# Altium PCB USB_to_CAN.PcbDoc
Units mil, origin at the board's own origin, x right, y up, seen from the top; angles counter-clockwise.
Board outline 2510 x 1345 mil, 2 copper layers (Top Layer, Bottom Layer); 43 components, 32 nets, 190 pads, 41 vias.
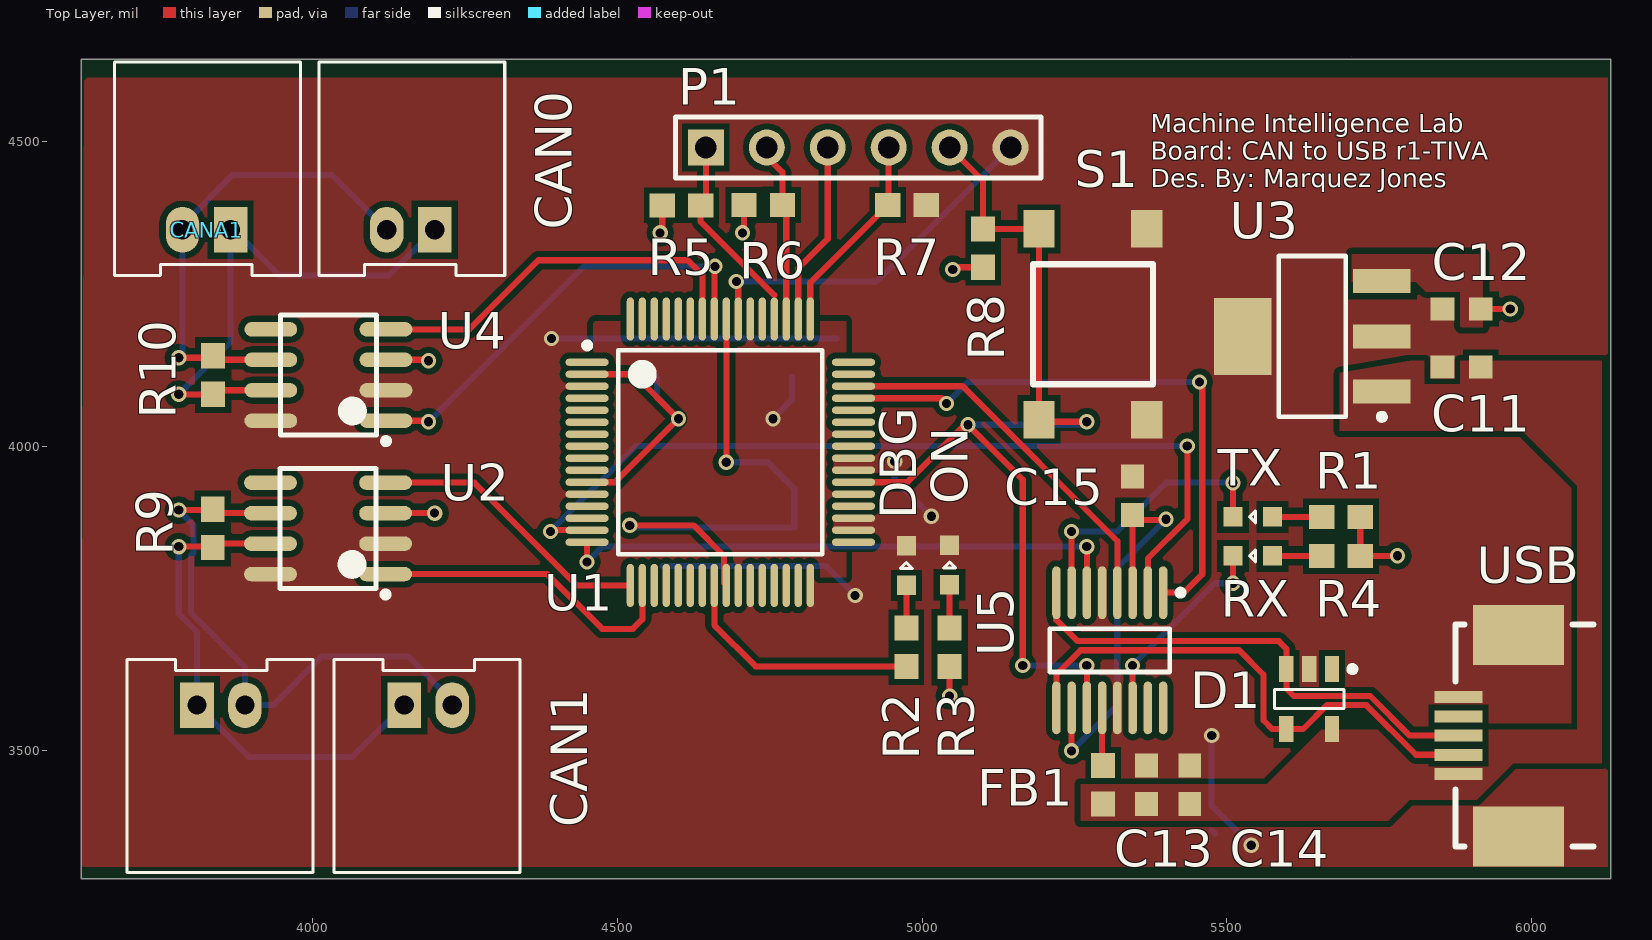
[diagram p0: Top Layer view]
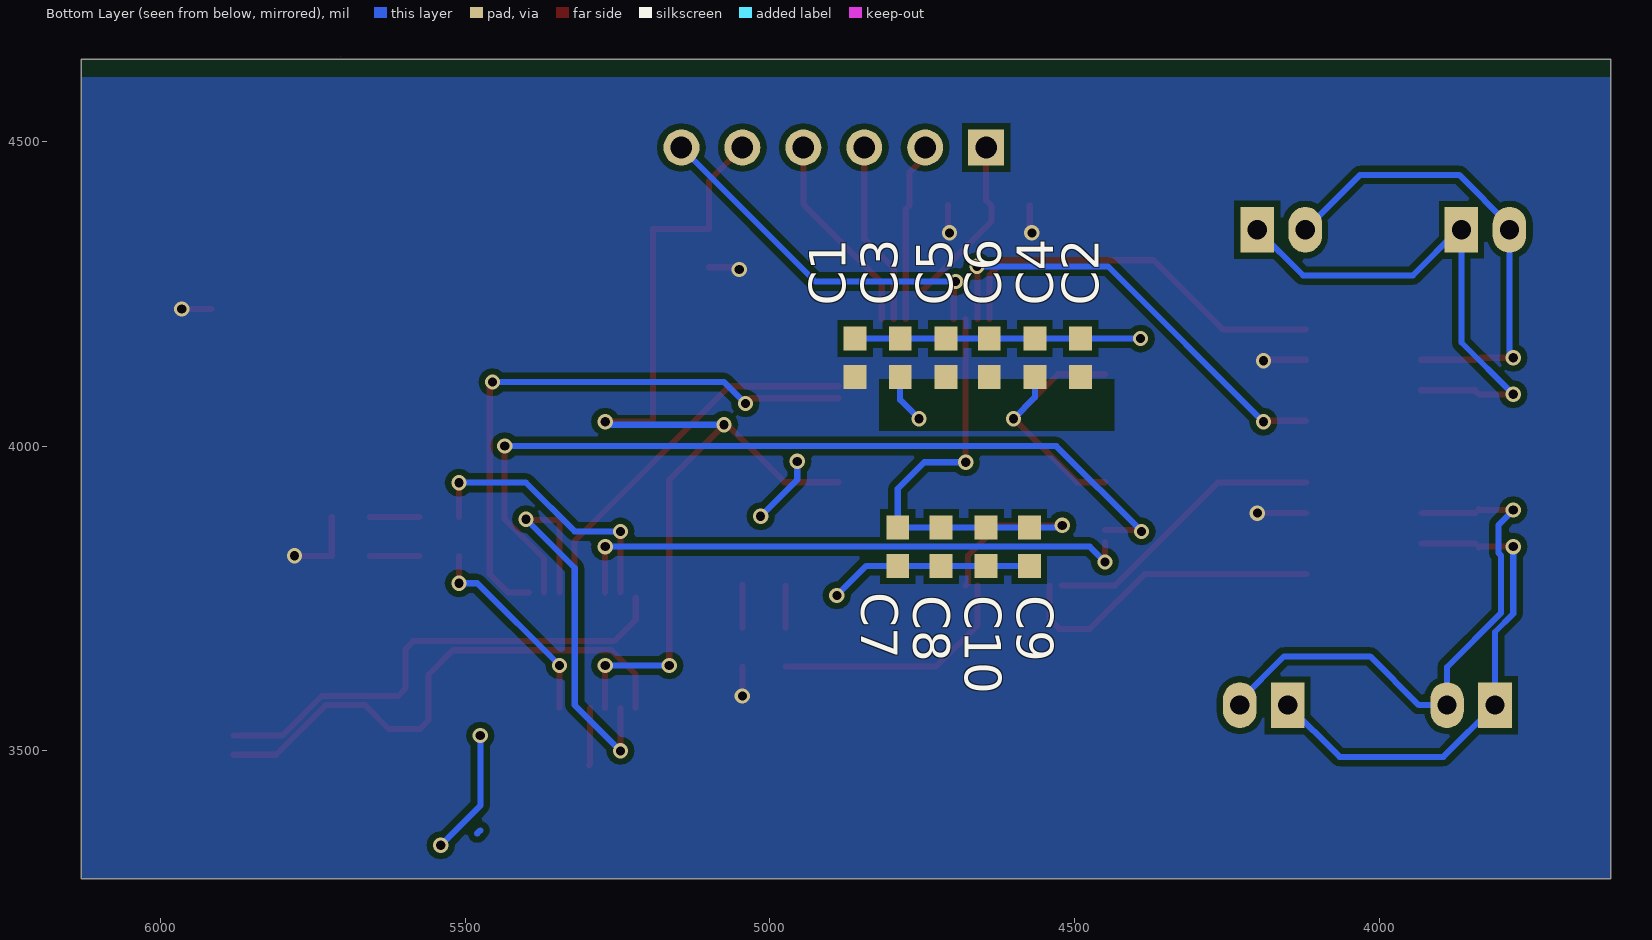
[diagram p1: Bottom Layer view, seen from below]

## Layer stack, top to bottom
Top Solder: solder mask 0.4, Solder Resist, Dk 3.5
Top Layer: signal copper 1.4
Dielectric 1: dielectric 12.6, FR-4, Dk 4.8
Bottom Layer: signal copper 1.4
Bottom Solder: solder mask 0.4, Solder Resist, Dk 3.5

## Board outline
3620,3290 3620,4635 6130,4635 6130,3290
cut-out: 5705,4640

## Design rules (kind name [scope] priority, off if disabled: settings)
Clearance [All] p1: gap=10 ignorepadtopadclearanceinfootprint=FALSE except(0: Arc-Hole Track-Hole SMDPad-Hole THPad-Hole Via-Hole Fill-Hole Poly-Hole Region-Hole Text-Hole; 5: Track-Track Track-SMDPad SMDPad-SMDPad; 7: Track-Via)
MinimumSolderMaskSliver [All] p1: minsoldermaskwidth=5
PolygonConnect [All] p1: connectstyle=Direct reliefconductorwidth=10 reliefentries=4 polygonreliefangle="90 Angle" airgapwidth=10
RoutingVias [All] p1: holewidth=28 width=50 viastyle="Through Hole" minholewidth=28 minwidth=50 maxholewidth=28 maxwidth=50
SolderMaskExpansion [All] p1: expansion=4
Width [All] p1: maxlimit=10 minlimit=10 preferedwidth=10
29 further rules are at their usual default settings.

## Components (designator, comment, footprint, x,y, rotation, side; value= is the part's Value field where it differs from the comment)
C1 "Cap" CAPC0603 4860,4145 r90 bottom value=0.01uF
C2 "Cap" CAPC0603 4490,4145 r90 bottom value=0.1uF
C3 "Cap" CAPC0603 4786.03,4145 r90 bottom value=0.01uF
C4 "Cap" CAPC0603 4565,4145 r90 bottom value=0.1uF
C5 "Cap" CAPC0603 4711.03,4145 r90 bottom value=0.01uF
C6 "Cap" CAPC0603 4640,4145 r90 bottom value=1.0uF
C7 "Cap" CAPC0603 4790,3835 r270 bottom value=0.1uF
C8 "Cap" CAPC0603 4718.97,3835 r270 bottom value=0.1uF
C9 "Cap" CAPC0603 4573.97,3835 r270 bottom value=1.0uF
C10 "Cap" CAPC0603 4645,3835 r270 bottom value=2.2uF
C11 "Cap" CAPC0603 5885,4130 r180 top value=1uF
C12 "Cap" CAPC0603 5885,4225 r180 top value=1uF
C13 "Cap" CAPC0603 5367.93,3444.36 r90 top value=4.7uF
C14 "Cap" CAPC0603 5438.97,3444.36 r90 top value=100nF
C15 "Cap" CAPC0603 5345,3918.26 r90 top value=100nF
CAN0 "2-pin Horz Sherlock" MOLEX-HDR-1X2-SHERLOCK-HORZ 4200,4355 r0 top (schematic designator CANA0)
CAN1 "2-pin Horz Sherlock" MOLEX-HDR-1X2-SHERLOCK-HORZ 4150,3575 r180 top (schematic designator CANB1)
CANA1 "2-pin Horz Sherlock" MOLEX-HDR-1X2-SHERLOCK-HORZ 3865,4355 r0 top
CANB0 "2-pin Horz Sherlock" MOLEX-HDR-1X2-SHERLOCK-HORZ 3810,3575 r180 top
D1 "824011" SOT95P280X116-5N 5635,3585 r270 top
DBG "LED" LED0603 4973.97,3804.03 r90 top (schematic designator LED37)
FB1 "FBead" RES0603 5296.9,3444.36 r90 top
ON "LED" LED0603 5045,3805 r90 top
P1 "JTAG" HDR1X6 4645,4490 r0 top
R1 "Res" RES0603 5687.24,3883.97 r180 top value=1k
R2 "Res" RES0603 4973.97,3670 r90 top value=10k
R3 "Res" RES0603 5045,3670 r90 top value=10k
R4 "Res" RES0603 5687.24,3820 r180 top value=1k
R5 "Res" RES0603 4605,4395 r0 top value=10k
R6 "Res" RES0603 4739.03,4395.54 r0 top value=10k
R7 "Res" RES0603 4975,4395.54 r0 top value=10k
R8 "Res" RES0603 5100,4325 r90 top value=10k
R9 "Res" RES0603 3835.86,3865 r270 top value=120
R10 "Res" RES0603 3836.5,4116.67 r270 top value=120
RX "LED" LED0603 5542.24,3820 r180 top
S1 "Button" PTS645xxxxSMTR92 5280,4200 r90 top
TX "LED" LED0603 5542.24,3883.97 r180 top
U1 "TM4C123GH6PMT7R" PM0064A_N 4668.68,3990 r0 top value=Value
U2 "SN65HVD230DR" SOIC-8pin 4025,3865 r180 top
U3 "3.3V LDO Reg" SOT23-4n 5640,4180 r180 top
U4 "SN65HVD230DR" SOIC-8pin 4025.64,4116.67 r180 top
U5 "FT230XS" FT230XS 5307.76,3665 r270 top
USB "UX60SC-MB-5ST" UX60SC-MB-5ST 5880,3525 r90 top

## Footprints (in the part's own frame and the unit in brackets; to place one, negate y for a bottom-side part, rotate by r counter-clockwise, add the part's x,y. Pads: shape width x height; smd on the part's side, far side on the other; paste and mask are expansions set on the pad)
CAPC0603 [mm] "Chip Capacitor, 2-Leads, Body 1.60x0.80mm, IPC Medium Density"
  rect 1x0.95 smd: 1(-0.8,0) 2(0.8,0)
  body extent -0.88,-0.48 0.87,0.48, height 0.8
FT230XS [mm] "SOP, 16-Leads, Body 4.90x3.90mm, Pitch 0.64mm, IPC Medium Density"
  oval 2.2x0.35 smd: 1(-2.4,2.222) 2(-2.4,1.587) 3(-2.4,0.952) 4(-2.4,0.317) 5(-2.4,-0.318) 6(-2.4,-0.953) 7(-2.4,-1.588) 8(-2.4,-2.223) 9(2.4,-2.222) 10(2.4,-1.587) 11(2.4,-0.952) 12(2.4,-0.317) 13(2.4,0.318) 14(2.4,0.953) 15(2.4,1.588) 16(2.4,2.223)
  silkscreen extent -2.52,-2.5 0.9,3.07, body extent -2,-2.5 2,2.5, height 1.76
HDR1X6 [mm] "Connector; Header; 6 Position"
  rect 1.5x1.5 hole 0.9: 1(0,0)
  round 1.5 hole 0.9: 2(2.54,0) 3(5.08,0) 4(7.62,0) 5(10.16,0) 6(12.7,0)
  silkscreen extent -1.27,-1.27 13.97,1.27
LED0603 [mm] "Chip LED, 2-Leads, Body 1.60x0.80mm, IPC Medium Density"
  rect 0.8x0.8 smd: A(-0.825,0) C(0.825,0)
  silkscreen extent -0.13,-0.25 0.12,0.25, body extent -0.88,-0.48 0.87,0.47, height 0.8
MOLEX-HDR-1X2-SHERLOCK-HORZ [mm]
  rect 1.397x1.905 hole 0.8: 1(0,0)
  oval 1.397x1.905 hole 0.8: 2(-2,0)
  silkscreen extent -4.83,-1.91 2.92,6.98, body extent -4.83,-1.91 2.87,8.59, height 5.54
PM0064A_N [mm]
  oval 1.8x0.3 smd paste-0.102 mask+0.051: 1(-5.55,3.75) 2(-5.55,3.25) 3(-5.55,2.75) 4(-5.55,2.25) 5(-5.55,1.75) 6(-5.55,1.25) 7(-5.55,0.75) 8(-5.55,0.25) 9(-5.55,-0.25) 10(-5.55,-0.75) 11(-5.55,-1.25) 12(-5.55,-1.75) 13(-5.55,-2.25) 14(-5.55,-2.75) 15(-5.55,-3.25) 16(-5.55,-3.75) 33(5.55,-3.75) 34(5.55,-3.25) 35(5.55,-2.75) 36(5.55,-2.25) 37(5.55,-1.75) 38(5.55,-1.25) 39(5.55,-0.75) 40(5.55,-0.25) 41(5.55,0.25) 42(5.55,0.75) 43(5.55,1.25) 44(5.55,1.75) 45(5.55,2.25) 46(5.55,2.75) 47(5.55,3.25) 48(5.55,3.75)
  oval 0.3x1.8 smd paste-0.102 mask+0.051: 17(-3.75,-5.55) 18(-3.25,-5.55) 19(-2.75,-5.55) 20(-2.25,-5.55) 21(-1.75,-5.55) 22(-1.25,-5.55) 23(-0.75,-5.55) 24(-0.25,-5.55) 25(0.25,-5.55) 26(0.75,-5.55) 27(1.25,-5.55) 28(1.75,-5.55) 29(2.25,-5.55) 30(2.75,-5.55) 31(3.25,-5.55) 32(3.75,-5.55) 49(3.75,5.55) 50(3.25,5.55) 51(2.75,5.55) 52(2.25,5.55) 53(1.75,5.55) 54(1.25,5.55) 55(0.75,5.55) 56(0.25,5.55) 57(-0.25,5.55) 58(-0.75,5.55) 59(-1.25,5.55) 60(-1.75,5.55) 61(-2.25,5.55) 62(-2.75,5.55) 63(-3.25,5.55) 64(-3.75,5.55)
  silkscreen extent -5.67,-4.25 4.25,4.57, body extent 0,0 0.25,0.25, height 0.25
PTS645xxxxSMTR92 [mm] "PTS645 Series SMT 6 mm Tactile Switch"
  rect 1.555x1.3 smd: A(-3.975,2.25) A(3.975,2.25) B(-3.975,-2.25) B(3.975,-2.25)
  silkscreen extent -2.5,-2.5 2.5,2.5, body extent -3,-3 3,3, height 4.5
RES0603 [mm] "Chip Resistor, 2-Leads, Body 1.60x0.80mm, IPC Medium Density"
  rect 1.05x1 smd: 1(-0.8,0) 2(0.8,0)
  body extent -0.88,-0.48 0.87,0.47, height 0.8
SOIC-8pin [mm] "For 296-1345-1-ND"
  oval 2.2x0.6 smd: 1(-2.4,1.905) 2(-2.4,0.635) 3(-2.4,-0.635) 4(-2.4,-1.905) 5(2.4,-1.905) 6(2.4,-0.635) 7(2.4,0.635) 8(2.4,1.905)
  silkscreen extent -2.53,-2.5 2,2.88, body extent -2,-2.5 2,2.5, height 1.75
SOT23-4n [mm] "SOT223, 4-Leads, Body 6.50x7.00mm (avg), Pitch 2.30mm, IPC Medium Density"
  rect 2.4x1 smd: 1(-2.9,2.3) 2(-2.9,0) 3(-2.9,-2.3)
  rect 2.4x3.2 smd: 4(2.9,0)
  silkscreen extent -3.03,-3.35 1.4,3.47, body extent -1.85,-3.35 1.85,3.35, height 1.7
SOT95P280X116-5N [mm] "SOT23, 5-Leads, Body 2.90x2.80mm, Pitch 0.95mm, IPC Medium Density"
  rect 1.1x0.6 smd: 1(-1.25,0.95) 2(-1.25,0) 3(-1.25,-0.95) 4(1.25,-0.95) 5(1.25,0.95)
  silkscreen extent -1.37,-1.45 0.4,1.93, body extent -0.8,-1.45 0.8,1.45, height 1.16
UX60SC-MB-5ST [mm] "USB Mini-B Recepticle"
  rect 0.5x2 smd: 1(-1.6,0) 2(-0.8,0) 3(0,0) 4(0.8,0) 5(1.6,0)
  rect 2.5x3.8 smd: SHD(-4.2,-2.5) SHD(4.2,-2.5)
  silkscreen extent -4.62,-5.63 4.62,0.13, body extent -4.9,-6.61 4.9,0.39, height 3.95

## Part data
C1 C2 C3 C4 C5 C6 C7 C8 C9 C10 C14 C15: Supplier Part Number 1=1276-1000-1-ND, Supplier 1=Digi-Key
C11 C12: Manufacturer Part Number=C0603C105K8PACTU, Supplier Part Number 1=399-3118-1-ND, Supplier 1=Digi-Key
C13: Supplier Part Number 1=311-1455-1-ND, Supplier 1=Digi-Key
CAN0 CAN1 CANA1 CANB0: library part MOLEX-HDR-1x2-SHERLOCK_RA, "Header, Molex, 2mm Pitch Sherlock Header, Single Row, Horizontal, 2 Circuits, Length 3.3mm,  0353630260", Manufacturer="Molex Inc", Manufacturer Part Number=0353630260, Supplier Part Number 1=WM18931-ND, Supplier 1=Digi-Key
D1: "USB ESD Protection Diodes"
DBG: Color=Blue, Supplier Part Number 1=754-1122-1-ND, Supplier 1=Digi-Key
FB1: "Ferrite Bead", Supplier Part Number 1=445-2988-1-ND, Supplier 1=Digi-Key
ON: Color=Green, Supplier Part Number 1=754-1122-1-ND, Supplier 1=Digi-Key
P1: library part "Header 6", "Header, 6-Pin", LatestRevisionDate=17-Jul-2002, LatestRevisionNote="Re-released for DXP Platform.", Publisher="Altium Limited"
R1 R2 R3 R4 R5 R6 R7 R8 R9 R10: Supplier Part Number 1=RMCF0603JT10K0CT-ND, Supplier 1=Digi-Key
RX TX: Color=Orange, Supplier Part Number 1=754-1122-1-ND, Supplier 1=Digi-Key
S1: "SPST Button", Supplier Part Number 1=CKN9087CT-ND, Supplier 1=Digi-Key
U1: "Imported", Alternate_PartNumber=TM4C123GH6PMT, Manufacturer="Texas Instruments", PartNumber=TM4C123GH6PMTR, CompType=IC, MountType=SMT, PackageReference=PM0064A, PIN_COUNT=64, RefDes=RefDes, RoHS=Y, TYPE=TYPE
U2 U4: "IC TXRX CAN 1MBPS 3.3V 8SOIC", Supplier Part Numbe 1=296-11654-1-ND, Supplier 1=Digi-Key
U3: library part LM3940IMPX-3.3, "IC REG LDO 3.3V 1A SOT223", Supplier Part Number 1=LM3940IMPX-3.3/NOPBCT-ND, Supplier 1=Digi-Key
U5: "USB To Basic UART IC", Supplier Part Number 1=768-1154-5-ND, Supplier 1=Digi-Key
USB: "USB Mini B Metal Shield SMT", Supplier Part Number 1=H11671CT-ND, Supplier 1=Digi-Key

## Via types
v1: diameter 25, hole 15, Top Layer to Bottom Layer, tented both sides, 41 vias

## Nets (pads, with @x,y where several pads share a name; then routed paths per layer and width w, separated by ;. In a path a pad name is that pad's centre, name@x,y a point inside that pad or via, vN(x,y) a via of type N, cw(c..) or ccw(c..) an arc to the next point about the centre after c; other vN are vias at no path point)
5V: C11.1 C13.1 C14.1 D1.5 FB1.1 U3.1 USB.1
CAN_RX0: U1.58 U4.4 | length 648.3
  Top Layer w10: U4.4 4256.67,4191.67 4370,4305 4615,4305 4639.15,4280.85 U1.58
CAN_RX1: U1.17 U2.4 | length 471.4
  Top Layer w10: U2.4 4265,3940 4433.5,3771.5 U1.17
CAN_TX0: U1.57 U4.1 | length 733.2
  Top Layer w10: U4.1 4188.33,4041.67 v1(4190,4040) ; U1.57 4658.84,4293.84 v1(4660,4295)
  Bottom Layer w10: v1(4190,4040) 4445,4295 v1(4660,4295)
CAN_TX1: U1.18 U2.1 | length 520.8
  Top Layer w10: U2.1 4385,3790 4475,3700 4525,3700 4540.73,3715.73 U1.18
CANH_A: CAN0.1 CANA1.1 R10.2 U4.7 | length 856
  Top Layer w10: v1(3780,4085) R10.2@3836.32,4085 ; R10.2 3842.99,4091.67 U4.7
  Bottom Layer w10: v1(3780,4085) 3865,4170 CANA1.1 3870,4355 3945,4280 4125,4280 CAN0.1
CANH_B: CAN1.1 CANB0.1 R9.2 U2.7 | length 827.5
  Top Layer w10: v1(3780,3835) 3834.36,3835 R9.2 ; R9.2@3842.35,3840 U2.7
  Bottom Layer w10: v1(3780,3835) 3780,3725 3810,3695 CANB0.1 3895,3490 4065,3490 CAN1.1
CANL_A: CAN0.2 CANA1.2 R10.1 U4.6 | length 768
  Top Layer w10: v1(3780,4145) R10.1@3833.33,4145 ; R10.1@3842.99,4141.67 U4.6
  Bottom Layer w10: v1(3780,4145) 3786.26,4151.26 CANA1.2 3786.26,4362.47 3868.79,4445 4031.26,4445 CAN0.2
CANL_B: CAN1.2 CANB0.2 R9.1 U2.6 | length 924.1
  Top Layer w10: v1(3780,3895) 3834.36,3895 R9.1 ; R9.1@3842.35,3890 U2.6
  Bottom Layer w10: v1(3780,3895) 3804.5,3870.5 3804.5,3824.85 3800,3820.35 3800,3726.21 3888.74,3637.47 CANB0.2 3935,3575 4015,3655 4156.21,3655 4228.74,3582.47 CAN1.2
CTS: U1.15 U5.2 | length 1431.3
  Top Layer w10: v1(4390,3860) 4392.05,3862.05 U1.15 ; U5.2 5370.26,3815.61 5435,3880.35 v1(5435,4000)
  Bottom Layer w10: v1(4390,3860) 4530,4000 v1(5435,4000)
DEBUG_LED: R2.1 U1.24 | length 408.5
  Top Layer w10: U1.24 4658.84,3706.16 4726.5,3638.5 R2.1
Dminus: D1.4 U5.9 USB.2 | length 878.4
  Top Layer w10: U5.9 5220.26,3625.26 5260,3665 5520,3665 5560,3625 5560,3550 5574.21,3535.79 D1.4 5624.79,3535.79 5664.01,3575 5728.79,3575 5810.28,3493.5 USB.2
Dplus: D1.3 U5.8 USB.3 | length 813.2
  Top Layer w10: U5.8@5220,3751.38 5220,3715 5255,3680 5585,3680 5597.6,3667.4 D1.3 5597.6,3602.4 5610,3590 5735,3590 5800,3525 USB.3
GND: C1.2 C2.2 C3.2 C4.2 C5.2 C6.2 C7.2 C8.2 C9.2 C10.2 C11.2 C12.2 C13.2 C14.2 C15.2 D1.2 DBG.C ON.C P1.6 R7.2 S1.B U1.3 U1.12 U1.27 U1.32 U1.34 U1.35 U1.39 U1.40 U1.55 U2.2 U2.8 U3.2 U3.4 U4.2 U4.8 U5.5 U5.13 USB.5 USB.SHD | length 1730.4
  Top Layer w10: v1(4695,4270) 4698.21,4266.79 U1.55
  Bottom Layer w10: v1(4391.5,4176.5) C2.2 C4.2 C6.2 C5.2 C3.2 C1.2 ; C9.2 C10.2 C8.2 C7.2 4841.5,3803.5 v1(4890,3755) ; v1(4695,4270) 4925,4270 P1.6 ; v1(4955,3975) 4955,3945 v1(5015,3885) ; v1(5475,3525) 5475,3410 v1(5540,3345)
NetC15_1: C15.1 U5.3 U5.10 | length 689.6
  Top Layer w10: v1(5245,3500) 5245.26,3500.26 U5.10 ; U5.3 5345.26,3878.25 5345,3878.5 5398.5,3878.5 v1(5400,3880)
  Bottom Layer w10: v1(5245,3500) 5320,3575 5320,3800 v1(5400,3880)
NetDBG_A: DBG.A R2.2 | length 70
  Top Layer w10: R2.2 DBG.A
NetFB1_2: FB1.2 U5.12 | length 95.3
  Top Layer w10: U5.12 5295.26,3477.5 FB1.2
NetON_A: ON.A R3.2 | length 71
  Top Layer w10: R3.2 ON.A
NetR1_2: R1.2 TX.A | length 81
  Top Layer w10: TX.A R1.2
NetR4_2: R4.2 RX.A | length 81
  Top Layer w10: RX.A R4.2
NRST: P1.5 R8.2 S1.A U1.38 U5.11 | length 1671.5
  Top Layer w10: U1.38 4975.79,3940.79 5070,4035 v1(5075,4035) 5165,3945 v1(5165,3640) ; P1.5 5100,4435 R8.2 5191.42,4356.5 5191.42,4043.5 5194.92,4040 v1(5270,4040) ; v1(5270,3640) 5270.26,3639.74 U5.11
  Bottom Layer w10: v1(5075,4035) 5265,4035 v1(5270,4040) ; v1(5165,3640) v1(5270,3640)
nRXLED: RX.C U5.14 | length 335.6
  Top Layer w10: v1(5345,3640) 5345.26,3639.74 U5.14 ; RX.C 5509.76,3775.24 v1(5510,3775)
  Bottom Layer w10: v1(5345,3640) 5480,3775 v1(5510,3775)
nTXLED: TX.C U5.7 | length 459.8
  Top Layer w10: U5.7 v1@5245.26,3865 ; TX.C 5509.76,3939.76 v1(5510,3940)
  Bottom Layer w10: v1(5245,3860) 5320,3860 5400,3940 v1(5510,3940)
RTS: U1.16 U5.6 | length 938.4
  Top Layer w10: v1(4450,3810) 4450.18,3810.18 U1.16 ; v1(5270,3835) 5270.26,3834.74 U5.6
  Bottom Layer w10: v1(4450,3810) 4475,3835 v1(5270,3835)
TCK/SWCLK: P1.1 R5.2 U1.52 | length 295.8
  Top Layer w10: P1.1 4645,4403.5 R5.2 4636.5,4368.5 4757.26,4247.74
TDI: P1.3 U1.50 | length 301.5
  Top Layer w10: U1.50 4796.63,4291.63 4845,4340 P1.3
TDO/SWO: P1.4 R7.1 U1.49 | length 334.8
  Top Layer w10: U1.49 4816.32,4268.36 R7.1 4945,4397.04 P1.4
TMS/SWDIO: P1.2 R6.2 U1.51 | length 294.7
  Top Layer w10: P1.2 4745,4475 4770.52,4449.48 R6.2 4776.95,4389.11 U1.51
USART_RX: U1.45 U5.1 | length 979.9
  Top Layer w10: U1.45 5031.42,4078.58 v1(5040,4070) ; U5.1 5429.49,3759.49 5459.5,3789.5 5459.5,4100.5 v1(5455,4105)
  Bottom Layer w10: v1(5040,4070) 5075,4105 v1(5455,4105)
USART_TX: U1.46 U5.4 | length 623.1
  Top Layer w10: U1.46 5066.31,4098.27 5320.26,3844.32 U5.4
VDD: C1.1 C2.1 C3.1 C4.1 C5.1 C6.1 C12.1 R1.1 R3.1 R4.1 R5.1 R6.1 R8.1 U1.2 U1.11 U1.26 U1.37 U1.42 U1.54 U2.3 U3.3 U4.3 | length 1055.2
  Top Layer w10: U2.3 v1(4200,3890) ; U4.3 4188.33,4141.67 v1(4190,4140) ; U1.11 4495.79,3940.79 v1(4600,4045) 4527.05,4117.95 U1.2 ; v1(4570,4350) 4573.5,4353.5 R5.1 ; v1(4705,4350) 4707.53,4352.53 R6.1 ; v1(5045,3590) R3.1 ; v1(5050,4290) 5053.5,4293.5 R8.1 ; R1.1 R4.1 v1(5780,3820) ; C12.1 v1(5965,4225)
  Bottom Layer w10: C4.1 4565,4080 v1(4600,4045) ; v1(4755,4045) 4786.03,4076.03 C3.1
VDDC: C7.1 C8.1 C9.1 C10.1 U1.25 U1.56 | length 925.1
  Top Layer w10: v1(4520,3870) 4624.97,3870 4674.74,3820.23 4674.74,3775.28 U1.25 ; v1(4678.52,3973.52) U1.56
  Bottom Layer w10: v1(4520,3870) 4523.5,3866.5 C9.1 C10.1 C8.1 C7.1 4790,3930 4746.48,3973.52 v1(4678.52,3973.52)
pads on no net: D1.1 U1.1 U1.4 U1.5 U1.6 U1.7 U1.8 U1.9 U1.10 U1.13 U1.14 U1.19 U1.20 U1.21 U1.22 U1.23 U1.28 U1.29 U1.30 U1.31 U1.33 U1.36 U1.41 U1.43 U1.44 U1.47 U1.48 U1.53 U1.59 U1.60 U1.61 U1.62 U1.63 U1.64 U2.5 U4.5 U5.15 U5.16 USB.4
copper on no net: | length 7.1
  Bottom Layer w10: 5475,3369.5 5480,3364.5

## Polygon pours and split planes (outlines as drawn)
GND on Top Layer "GND" (solid, pour order 12): 3624.7,4599.42 3629.7,4604.42 6124.7,4604.42 6124.7,3310 3619.87,3310
VDD on Top Layer "3V3" (solid, pour order 10): 5705,4315 5920,4315 5920,4195 5885,4195 5810,4270 5705,4270
no net on Top Layer "3V3" (solid, pour order 8): 5705,4315
no net on Top Layer "3V3" (solid, pour order 6): 5725,4275
VDD on Top Layer "3V3" (solid, pour order 4): 4460,4205 4875,4205 4875,3785 4465,3785
5V on Top Layer "3V3" (solid, pour order 0): 5260,3445 5260,3385 5765,3385 5800,3420 5910,3420 5970,3480 6115,3480 6115,4140 6060,4140 5800,4140 5685,4120 5685,4025 5985,4025 6075,3935 6075,3535 5655,3535 5565,3445
VDD on Bottom Layer "3V3" (solid, pour order 2): 3620,4605 6130,4605 6130,3295 6125,3290 3620,3290

## Other copper
Bottom Layer:
  pour cut-out: 4435,4110 4820,4110 4820,4025 4435,4025

## Silkscreen, mask and mechanical layers (free items; w line width, h text height)
Top Overlay:
  text "Machine Intelligence Lab / Board: CAN to USB r1-TIVA / Des. By: Marquez Jones" at 5375,4425 h30